# Altium PCB Board_VCA_Altium.pcbdoc
Units mil, origin at the board's own origin, x right, y up, seen from the top; angles counter-clockwise.
Board outline 2192.89 x 2017.95 mil, 2 copper layers (Top Layer, Bottom Layer); 21 components, 14 nets, 65 pads, 15 vias.
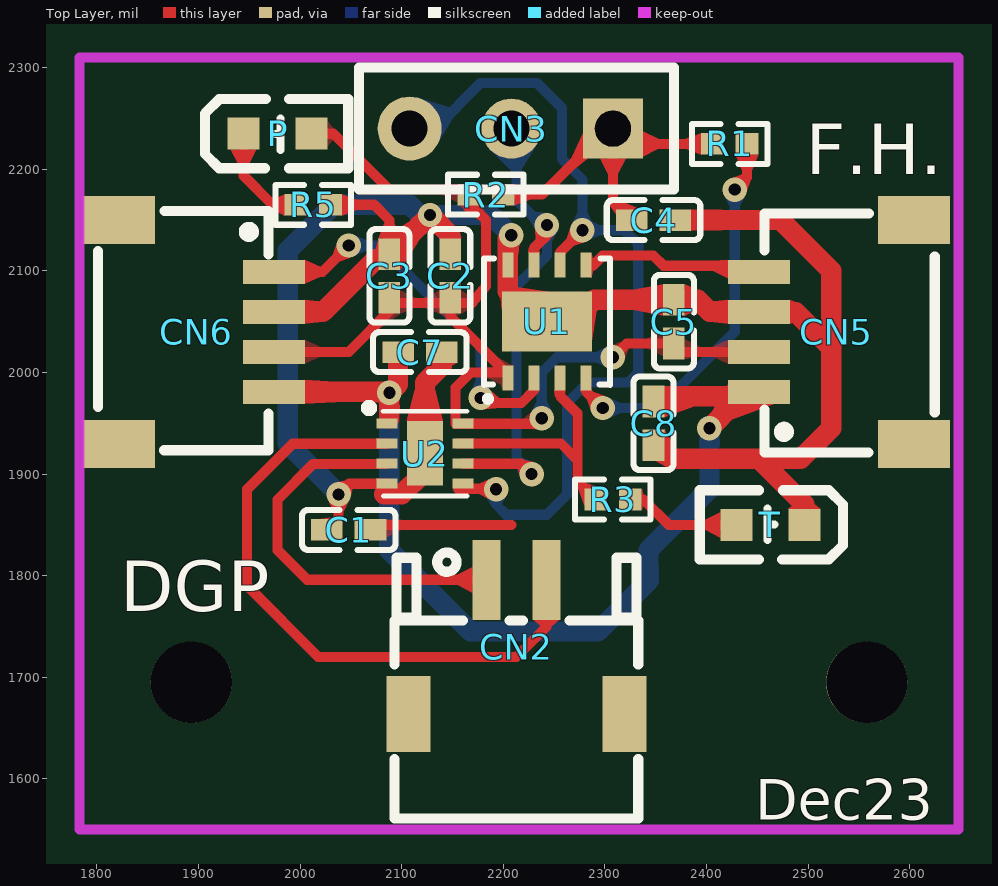
[diagram p0: Top Layer view]
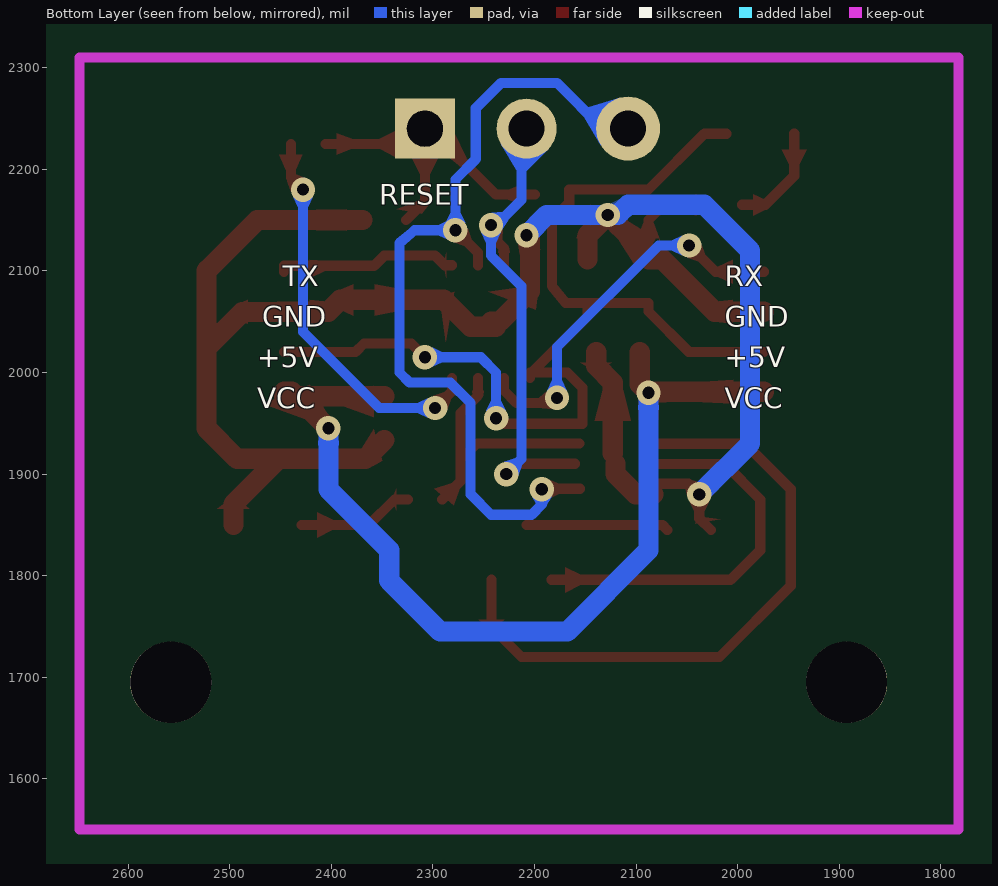
[diagram p1: Bottom Layer view, seen from below]

## Layer stack, top to bottom
Top Layer: signal copper (thickness not stored)
Dielectric: dielectric 12.6, FR-4, Dk 4.8
Bottom Layer: signal copper (thickness not stored)

## Board outline
3192.89,1000 1000,1000 1000,3017.95 3192.89,3017.95

## Components (designator, comment, footprint, x,y, rotation, side; value= is the part's Value field where it differs from the comment)
C1 "1uF" C0402 2047.89,1845 r0 top
C2 "100nF" C0402_NEW 2147.89,2095 r90 top
C3 "22uF" C0402 2087.89,2095 r270 top
C4 "100nF" C0402_NEW 2347.89,2150 r180 top
C5 "22uF" C0402 2367.89,2050 r270 top
C7 "22uF" C0402 2117.89,2020 r180 top
C8 "22uF" C0402 2347.89,1950 r90 top
CN2 "S2B-ZR-SM4A-TF(LF)(SN)" CONN-SMD_S2B-ZR-SM4A 2212.89,1730 r0 top
CN3 "3 Pads Solder" 3PADS-JED 2207.89,2240 r270 top
CN5 "SM04B-SRSS-TB (LF)(SN)" CONN-SMD_4P-P1.00_SM04B-SRSS-TB-LF-SN 2527.89,2040 r90 top
CN6 "SM04B-SRSS-TB (LF)(SN)" CONN-SMD_4P-P1.00_SM04B-SRSS-TB-LF-SN 1897.89,2040 r270 top
P "19-213/GVC-CK0LLY/3T(HW)" LED0603-R-RD 1977.89,2235 r0 top
R1 "300Ω" R0402 2422.89,2225 r0 top
R2 "10kΩ" R0402 2182.89,2175 r180 top
R3 "1kΩ" R0402 2307.89,1875 r0 top
R5 "10kΩ" R0402 2012.89,2165 r180 top
T "19-213/GVC-CK0LLY/3T(HW)" LED0603-R-RD 2462.89,1850 r180 top
U1 "PIC16F18313-E/RF" DFN-8_L3.0-W3.0-P0.65-BL-EP 2242.89,2050 r0 top
U2 "DRV8837DSGR" WSON-8_L2.0-W2.0-P0.50-TL-EP 2122.89,1920 r0 top
? "" ? 2215.39,2415.47 r0 top
? "" ? 1637.92,1928.75 r0 top

## Footprints (in the part's own frame and the unit in brackets; to place one, negate y for a bottom-side part, rotate by r counter-clockwise, add the part's x,y. Pads: shape width x height; smd on the part's side, far side on the other; paste and mask are expansions set on the pad)
3PADS-JED [mm]
  rect 1.5x1.5 hole 0.9 slot 0.9 at 0 deg paste+0 mask+0.102: 1(0,2.54)
  round 1.5 hole 0.9 paste+0 mask+0.102: 2(0,0)
  round 1.6 hole 0.9 paste+0 mask+0.102: 3(0,-2.54)
  silkscreen extent -1.52,-3.81 1.52,4.06
C0402 [mm]
  rect 0.79x0.54 smd paste-100 mask+0.051: 1(-0.545,0) 2(0.545,0)
  silkscreen extent -1.17,-0.5 1.17,0.5
C0402_NEW [mm]
  rect 0.79x0.54 smd paste-100 mask+0.051: 1(-0.545,0) 2(0.545,0)
  silkscreen extent -1.17,-0.5 1.17,0.5
CONN-SMD_4P-P1.00_SM04B-SRSS-TB-LF-SN [mm]
  rect 0.6x1.55 smd paste+0 mask+0.051: 1(-1.5,1.938) 2(-0.5,1.938) 3(0.501,1.938) 4(1.5,1.938)
  rect 1.2x1.8 smd paste+0 mask+0.051: 5(2.8,-1.938) 6(-2.8,-1.938)
  silkscreen extent -3.02,-2.46 2.96,1.8
CONN-SMD_S2B-ZR-SM4A [mm]
  rect 1.1x1.9 smd paste+0 mask+0.051: 0(-2.7,-1.675) 0(2.7,-1.675)
  rect 0.7x2 smd paste+0 mask+0.051: 1(-0.75,1.675) 2(0.75,1.675)
  silkscreen extent -3.05,-4.29 3.05,2.36
DFN-8_L3.0-W3.0-P0.65-BL-EP [mm]
  rect 0.28x0.625 smd paste+0 mask+0.051: 1(-0.975,-1.412) 2(-0.325,-1.412) 3(0.325,-1.412) 4(0.975,-1.412) 5(0.975,1.412) 6(0.325,1.412) 7(-0.325,1.412) 8(-0.975,1.412)
  rect 2.25x1.5 smd paste+0 mask+0.051: 9(0,0)
  silkscreen extent -1.58,-2.01 1.58,1.58
LED0603-R-RD [mm]
  rect 0.8x0.8 smd paste+0 mask+0.051: 1(0.851,0) 2(-0.851,0)
  silkscreen extent -1.82,-0.86 1.77,0.86
R0402 [mm]
  rect 0.566x0.54 smd paste-100 mask+0.051: 1(-0.433,0) 2(0.433,0)
  silkscreen extent -0.94,-0.5 0.94,0.5
WSON-8_L2.0-W2.0-P0.50-TL-EP [mm]
  rect 0.521x0.25 smd paste+0 mask+0.051: 1(-0.95,0.75) 2(-0.95,0.25) 3(-0.95,-0.25) 4(-0.95,-0.75) 5(0.95,-0.75) 6(0.95,-0.25) 7(0.95,0.25) 8(0.95,0.75)
  rect 0.902x1.613 smd paste+0 mask+0.051: 9(0,0.013)
  silkscreen extent -1.47,-1.06 1.06,1.22
? [mil]

## Free pads (board coordinates)
  round 80 hole 80 unplated paste+0: ""(1892.89,1695) ""(2557.89,1695)

## Via types
v1: diameter 24.02, hole 12, Top Layer to Bottom Layer, tented both sides, 15 vias

## Nets (pads, with @x,y where several pads share a name; then routed paths per layer and width w, separated by ;. In a path a pad name is that pad's centre, name@x,y a point inside that pad or via, vN(x,y) a via of type N, cw(c..) or ccw(c..) an arc to the next point about the centre after c; other vN are vias at no path point)
+5V: C1.2 C2.1 C3.2 C5.2 CN5.2 CN6.3 P.1 R2.2 U1.1 U2.8 | length 1227
  Top Layer w10: CN6.3 2048.19,2020.3 2087.89,2060 2087.89,2068.5 C2.1@2147.89,2068.5 ; P.1 2032.89,2235 2087.89,2180 2165.89,2180 R2.2@2165.89,2175 ; C1.2@2069.39,1845 2074.39,1850 2207.89,1850 ; 2165.89,2162 R2.2@2165.89,2175 ; v1(2237.89,1955) 2232.39,1949.5 U2.8 2152.89,1949.5 2152.89,1985 2167.89,2000 2204.49,2000 U1.1 2204.49,1998.4 2147.89,2055 C2.1@2147.89,2068.5 ; v1(2307.89,2015) 2321.39,2028.5 C5.2 2376.09,2020.3 CN5.2@2446.59,2020.3 ; C2.1@2147.89,2068.5 2169.39,2068.5 2182.89,2085 2182.89,2150 2165.89,2167 R2.2@2165.89,2175
  Bottom Layer w10: v1(2237.89,1955) 2237.89,2000 2252.89,2015 v1(2307.89,2015)
GND: C1.1 C2.2 C3.1 C4.1 C5.1 C7.1 C8.1 CN5.3 CN6.2 R5.1 T.2 U1.8 U1.9 U2.4 U2.9 | length 2150.7
  Top Layer w10: C1.1 2037.89,1856.5 v1(2037.89,1880) 2048.39,1890.5 U2.4 ; R5.1 2072.89,2165 2087.89,2150 C3.1@2087.89,2111.5
  Top Layer w20: CN6.2 2022.59,2059.7 2074.39,2111.5 2087.89,2111.5 2087.89,2115 v1(2127.89,2155) 2147.89,2135 C2.2@2147.89,2111.5 ; 2082.89,1880 2100.29,1880 2120.29,1900 U2.9@2120.29,1910 ; U2.9 2122.89,1990 2139.39,2006.5 C7.1@2139.39,2020 ; v1(2207.89,2135) 2204.49,2131.6 U1.8 2204.49,2080 2234.49,2050 U1.9 ; U1.9@2237.89,2045 2262.89,2045 2289.39,2071.5 C5.1 2391.39,2071.5 2403.19,2059.7 CN5.3 ; C8.1@2347.89,1933.5 2366.39,1915 2492.89,1915 2522.89,1945 2522.89,2100 2517.89,2105 2472.89,2150 C4.1@2369.39,2150 ; CN5.3@2446.59,2059.7 2487.89,2059.3 2522.89,2024.3 ; 2451.59,1915 2496.39,1870.2 T.2
  Bottom Layer w20: v1(2037.89,1880) 1987.89,1930 1987.89,2120 2032.89,2165 2107.89,2165 2117.89,2155 v1(2127.89,2155) 2187.89,2155 v1(2207.89,2135)
OUT1: CN2.2 U2.2 | length 633.3
  Top Layer w10: U2.2 1992.69,1929.8 1947.89,1885 1947.89,1790 2017.89,1720 2212.89,1720 2242.39,1749.5 CN2.2
OUT2: CN2.1 U2.3 | length 389.7
  Top Layer w10: U2.3 2012.89,1910 1977.89,1875 1977.89,1825 2006.99,1795.9 CN2.1
P_2: P.2 R5.2 | length 104.8
  Top Layer w10: P.2 1944.39,2193.5 1972.89,2165 R5.2@1995.89,2165
RA0: CN3.2 U1.7 U2.6 | length 495.5
  Top Layer w10: U2.6 2217.69,1910.2 v1(2227.89,1900) ; U1.7 2230.09,2122.2 2242.89,2135 v1(2242.89,2145)
  Bottom Layer w10: CN3.2@2212.89,2250 2212.89,2170 v1@2237.89,2145 ; v1(2227.89,1900) 2212.89,1915 2212.89,2085 2242.89,2115 v1(2242.89,2145)
RA1: CN3.3 U1.6 U2.5 | length 845.6
  Top Layer w10: 2155.29,1885.5 2192.39,1885.5 v1(2192.89,1885) ; U1.6 2255.69,2117.8 v1(2277.89,2140)
  Bottom Layer w10: CN3.3 2132.89,2240 2177.89,2285 2232.89,2285 2257.89,2260 2257.89,2210 2277.89,2190 v1(2277.89,2140) 2317.89,2140 2332.89,2127.5 2332.89,2000 2322.89,1990 2282.89,1990 2262.89,1970 2262.89,1880 2242.89,1860 2202.89,1860 2192.89,1870 v1(2192.89,1885)
RST: R1.2 U1.4 | length 387.3
  Top Layer w10: U1.4 2281.29,1981.6 v1(2297.89,1965) ; v1(2427.89,2180) 2439.89,2192 R1.2
  Bottom Layer w10: v1(2297.89,1965) 2352.89,1965 2427.89,2040 v1(2427.89,2180)
RX: CN6.1 U1.2 | length 380.3
  Top Layer w10: CN6.1@1974.19,2099.1 2021.99,2099.1 v1(2047.89,2125) ; v1(2177.89,1975) 2177.89,1970 2217.89,1970 2230.09,1982.2 U1.2
  Bottom Layer w10: v1(2047.89,2125) 2077.89,2125 2177.89,2025 v1(2177.89,1975)
SLEEP: R3.1 U1.3 U2.7 | length 257.8
  Top Layer w10: U2.7@2155.69,1930 2256.79,1930 2272.89,1913.9 ; U1.3 2255.69,1977.2 2272.89,1960 2272.89,1893 R3.1@2290.89,1875
SW: C4.2 CN3.1 R1.1 R2.1 | length 345.9
  Top Layer w10: R2.1 2237.89,2175 CN3.1@2312.89,2250 ; C4.2 2307.89,2168.5 CN3.1 2322.89,2225 R1.1@2405.89,2225
T_1: R3.2 T.1 | length 114.9
  Top Layer w10: R3.2 2337.89,1875 2362.89,1850 2372.89,1850 T.1
TX: CN5.4 U1.5 | length 179.2
  Top Layer w10: U1.5 2288.49,2105.6 2297.89,2115 2347.89,2115 2357.89,2105 2446.59,2105 CN5.4@2446.59,2099.1
VCC: C7.2 C8.2 CN5.1 CN6.4 U2.1 | length 988.6
  Top Layer w20: CN6.4 2086.99,1980.9 v1(2087.89,1980) ; 2087.89,1955 v1(2087.89,1980) ; v1@2087.89,1970 v1(2087.89,1980) ; C7.2 2096.39,1988.5 v1(2087.89,1980) ; C8.2@2347.89,1976.5 CN5.1@2446.59,1976.5 ; v1(2402.89,1945) 2438.79,1980.9 CN5.1@2446.59,1980.9
  Bottom Layer w20: v1(2087.89,1980) 2087.89,1825 2167.89,1745 2292.89,1745 2343.09,1795.2 2342.89,1825 2402.89,1885 v1(2402.89,1945)
pads on no net: CN2.0 CN5.5 CN5.6 CN6.5 CN6.6

## Polygon pours and split planes (outlines as drawn)
GND on Bottom Layer (solid): 1752.89,2335 1732.89,1510 1727.89,1505 2682.89,1505 2687.89,1500 2687.89,2340 2692.89,2345
+5V on Top Layer (solid): 1732.89,2345 1732.89,1515 1727.89,1510 2687.89,1510 2687.89,2335 2682.89,2340

## Other copper
Top Layer:
  region net RA1: 2279.58,2128.11 2266,2141.7 2262.46,2131.65 2269.53,2124.58
  region net RA0: 2249.43,2134.93 2231.39,2141.54 2231.93,2131.11 2242.28,2127.32
  region net RA1: 2185.97,1894.82 2185.4,1875.61 2175.93,1880.5 2176.23,1890.5
  region net RA0: 2229.58,1911.89 2216,1898.3 2214.15,1906.66 2221.22,1913.74
  region net VCC: 2414.77,1943.3 2401.19,1956.89 2407.7,1963.96 2421.84,1949.82
  region net RST: 2299.58,1976.89 2286,1963.3 2282.46,1973.35 2289.53,1980.42
  region net RST: 2439.77,2178.3 2426.19,2191.89 2436.24,2195.42 2443.31,2188.35
  region net RX: 2187.62,1982.03 2181.91,1963.69 2192.38,1965 2195.49,1975
  region net RX: 2049.58,2113.11 2036,2126.7 2032.46,2116.65 2039.53,2109.58
  region net GND: 2129.58,2143.11 2116,2156.7 2108.93,2150.18 2123.07,2136.04
  region net GND: 2139.77,2156.7 2126.19,2143.11 2132.7,2136.04 2146.84,2150.18
  region net GND: 2049.77,1878.3 2036.19,1891.89 2044.85,1894.04 2051.92,1886.96
  region net GND: 2028.28,1872.8 2047.49,1872.8 2042.89,1863.19 2032.89,1863.19
  region net GND: 2215.84,2126 2197.02,2129.89 2194.49,2120.6 2214.49,2116.47
  region net VCC: 2078.28,1972.8 2097.49,1972.8 2097.89,1963.19 2077.89,1963.19
  region net VCC: 2081.21,1989.98 2080.18,1970.79 2070.56,1970.9 2071.64,1990.9
  region net VCC: 2099.77,1978.3 2086.19,1991.89 2089.32,1995.57 2103.46,1981.43
  region net OUT1: 2254.89,1756.58 2229.89,1756.58 2237.39,1749.5 2247.39,1749.5
  region net OUT2: 2169.58,1783.4 2169.58,1808.4 2154.58,1800.9 2154.58,1790.9
  region net GND: 2017.37,1855.63 2041.98,1851.23 2041.42,1852.92 2031.89,1857.53
  region net GND: 2137.26,2132.01 2158.52,2132.01 2157.89,2135 2137.89,2135
  region net GND: 2098.52,2132.01 2077.26,2132.01 2082.89,2147.01 2092.89,2147.01
  region net GND: 2077.26,2132.01 2077.26,2100.91 2074.39,2101.5 2074.39,2121.5
  region net GND: 2080.83,2132.01 2098.52,2100.91 2116.68,2129.65 2106.43,2147.69
  region net SW: 2310.87,2156.13 2335.47,2160.63 2313.86,2169.6 2304.35,2164.97
  region net GND: 2384.9,2139.37 2384.9,2160.63 2414.9,2160 2414.9,2140
  region net GND: 2378.52,2055.91 2378.52,2087.01 2391.39,2081.5 2391.39,2061.5
  region net GND: 2357.26,2087.01 2357.26,2055.91 2327.26,2061.5 2327.26,2081.5
  region net GND: 2123.79,2009.37 2154.9,2009.37 2149.39,2006.5 2129.39,2006.5
  region net SW: 2320.39,2210.47 2295.39,2210.47 2302.89,2195.47 2312.89,2195.47
  region net SW: 2337.41,2237.5 2337.41,2212.5 2352.41,2220 2352.41,2230
  region net SW: 2282.58,2210.47 2278.36,2235.11 2267.21,2211.39 2269.27,2199.32
  region net VCC: 2467.33,1969.1 2421.09,1988.12 2405.74,1961.99 2425.78,1953.75
  region net TX: 2421.09,2092.5 2421.09,2110.9 2406.09,2110 2406.09,2100
  region net GND: 2421.09,2047.9 2421.09,2071.5 2403.19,2069.7 2403.19,2049.7
  region net GND: 2482.09,2071.5 2482.09,2047.9 2487.79,2049.3 2487.89,2069.3
  region net GND: 2004.7,2071.49 2004.7,2047.87 2022.59,2049.7 2022.59,2069.7
  region net RX: 2004.7,2110.86 2004.7,2087.23 2019.7,2094.1 2019.7,2104.1
  region net VCC: 2004.68,1992.74 2004.68,1969.12 2034.68,1970.9 2034.68,1990.9
  region net P_2: 1956.88,2219.25 1931.88,2219.25 1939.38,2204.25 1949.38,2204.25
  region net RST: 2451.06,2214.37 2428.79,2214.37 2434.89,2199.37 2444.89,2199.37
  region net SW: 2394.71,2235.63 2394.71,2214.37 2379.71,2220 2379.71,2230
  region net SW: 2211.06,2164.37 2211.06,2185.63 2226.06,2180 2226.06,2170
  region net P_2: 1984.71,2154.37 1984.71,2175.63 1972.89,2170 1972.89,2160
  region net GND: 2041.06,2154.37 2041.06,2175.63 2056.06,2170 2056.06,2160
  region net T_1: 2413.69,1837.5 2413.69,1862.5 2398.69,1855 2398.69,1845
  region net GND: 2480.69,1865.7 2512.09,1865.7 2506.39,1870.2 2486.39,1870.2
  region net SLEEP: 2261.19,1982.09 2250.17,1982.09 2250.69,1977.2 2260.69,1977.2
  region net RST: 2286.78,1982.09 2275.76,1982.09 2276.29,1981.6 2286.29,1981.6
  region net TX: 2286.78,2093.31 2286.78,2117.91 2288.49,2110.6 2288.49,2100.6
  region net RA0: 2235.6,2117.91 2224.58,2117.91 2225.09,2122.2 2235.09,2122.2
  region net GND: 2198.59,2061.79 2245.34,2079.53 2214.74,2083.89 2197.41,2072.93
  region net GND: 2279.27,2079.53 2287.18,2030.16 2291.34,2059.31 2282.31,2078.57
  region net GND: 2105.14,1952.25 2140.64,1952.25 2132.89,1982.25 2112.89,1982.25
  region net VCC: 2358.52,1987.01 2358.52,1955.91 2388.52,1966.5 2388.52,1986.5
  region net GND: 2358.52,1944.09 2349.79,1912.99 2359.32,1907.93 2369.49,1926.04
  region net T_1: 2336.06,1885.63 2336.06,1864.37 2337.89,1870 2337.89,1880
  region net SLEEP: 2279.71,1869.36 2298.69,1885.63 2281.94,1891.02 2274.32,1884.5
Bottom Layer:
  region net RA1: 2134.66,2223.42 2116.31,2270.35 2146.96,2261.15 2150.94,2250.98
  region net RA0: 2186.58,2219.56 2233.48,2225.27 2217.89,2199.57 2207.89,2198.36
  region net RA1: 2285.09,2130.39 2285.09,2149.61 2294.7,2145 2294.7,2135
  region net RA1: 2268.28,2147.2 2287.49,2147.2 2282.89,2156.81 2272.89,2156.81
  region net RA0: 2242.05,2156.98 2231.62,2140.84 2225.99,2149.83 2231.54,2158.42
  region net RA0: 2233.28,2137.8 2252.49,2137.8 2247.89,2128.19 2237.89,2128.19
  region net RA1: 2183.28,1877.8 2202.49,1877.8 2197.89,1870 2187.89,1870
  region net RA0: 2229.58,1911.89 2216,1898.3 2212.46,1908.35 2219.53,1915.42
  region net VCC: 2393.28,1937.8 2412.49,1937.8 2412.89,1928.19 2392.89,1928.19
  region net RST: 2305.09,1955.39 2305.09,1974.61 2314.7,1970 2314.7,1960
  region net RST: 2418.28,2172.8 2437.49,2172.8 2432.89,2163.19 2422.89,2163.19
  region net RX: 2168.28,1982.2 2187.49,1982.2 2182.89,1991.81 2172.89,1991.81
  region net RX: 2055.09,2115.39 2055.09,2134.61 2064.7,2130 2064.7,2120
  region net +5V: 2300.68,2005.39 2300.68,2024.61 2291.07,2020 2291.07,2010
  region net VCC: 2078.28,1972.8 2097.49,1972.8 2097.89,1963.19 2077.89,1963.19
  region net +5V: 2228.28,1962.2 2247.49,1962.2 2242.89,1971.81 2232.89,1971.81

## Silkscreen, mask and mechanical layers (free items; w line width, h text height)
Top Overlay:
  text "F.H." at 2497.89,2195 h50
  text "DGP" at 1822.89,1765 h50
  text "Dec23" at 2447.89,1560 h40
Bottom Overlay:
  text "RESET" at 2352.89,2165 h20
  text "RX" at 2012.89,2085 h20
  text "TX" at 2447.89,2085 h20
  text "GND" at 2012.89,2045 h20
  text "GND" at 2467.89,2045 h20
  text "+5V" at 2012.89,2005 h20
  text "+5V" at 2472.89,2005 h20
  text "VCC" at 2012.89,1965 h20
  text "VCC" at 2472.89,1965 h20